# EAGLE board APDS-9008 Breakout (EAGLE 6.4)
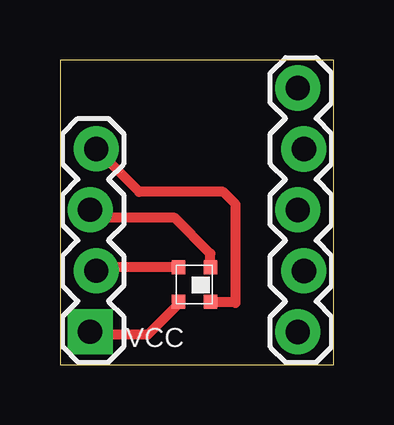
[diagram p0: board, top side]
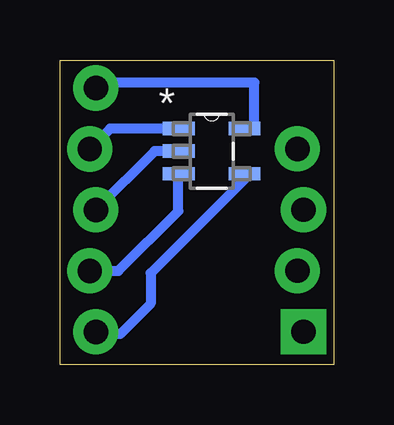
[diagram p1: board, bottom side, seen from below]

Size 11.4 x 12.69 mm. Coordinates in mm from the lower left corner, seen from the top.
Outline: 0,0 11.4,0 11.4,12.69 0,12.69 0,0
Copper layers (1*16): Top 0.035mm / dielectric 1.5mm / Bottom 0.035mm
Design rules "default": minimum track width 10mil, minimum drill 24mil, track to track 8mil, track to pad 8mil, pad to pad 8mil, via to via 8mil, smd to smd 8mil, copper to edge 40mil, drill to drill 8mil, minimum pad ring 10mil, minimum via ring 8mil, stop-mask expansion 4mil, vias tented up to drill 0mil, thermal gap 10mil

## Footprints (pad centres in the part's own frame; a part is rotated, then mirrored left to right if it is on the bottom)
1X04_LOCK = drill 1.016 pad 1.88 square: 1 0,0.127 | drill 1.016 pad 1.88: 2 2.54,-0.127; 3 5.08,0.127; 4 7.62,-0.127
1X05_LOCK = drill 1.016 pad 1.88: 1 0,0.127; 2 2.54,-0.127; 3 5.08,0.127; 4 7.62,-0.127; 5 10.16,0.127
APDS9008 = smd 0.577 x 0.577: GND 0.08,-1.52; NCC1 0.08,-0.08; OUT 1.41,-1.52; VCC 1.41,-0.08
SOT95P270X145-5N = smd 1.321 x 0.559: 1 -1.372,0.94; 2 -1.372,0; 3 -1.372,-0.94; 4 1.372,-0.94; 5 1.372,0.94

## Placement (x,y rotation side)
JP1  [1X04_LOCK]  1.38,1.37 90 top
JP2  [1X05_LOCK]  10.03,1.36 90 top
U$1  APDS9008  [APDS9008]  6.35,2.54 180 top
U$2  MCP6001UT-E/OT  [SOT95P270X145-5N]  5.08,8.89 0 bottom

## Library data of the parts
JP1 JP2 = SparkFun
U$1 = Random parts
U$2 = Random parts; MPN: MCP6001UT-E/OT; OC_FARNELL: 1840893; OC_NEWARK: 84R5183; PACKAGE: SOT23-5; SUPPLIER: Microchip

## Nets
A-GND: JP1.3 U$1.GND
A-NC: JP1.4 U$1.NCC1
A-OUT: JP1.2 U$1.OUT
A-VCC: JP1.1 U$1.VCC
M-VDD: JP2.5 U$2.5
M-VIN+: JP2.2 U$2.3
M-VIN-: JP2.1 U$2.4
M-VOUT: JP2.4 U$2.1
M-VSS: JP2.3 U$2.2

## Tracks (layer width: path | path; a pad name or v marks a point on that pad's centre or on a via)
A-GND
  Top 0.406: U$1.GND 6.27,4.63 4.78,6.11 1.59,6.11 JP1.3
A-NC
  Top 0.406: U$1.NCC1 7.27,2.62 7.32,2.57 7.32,6.68 6.79,7.2 3.3,7.2 JP1.4
A-OUT
  Top 0.406: U$1.OUT 1.66,4.06 JP1.2
A-VCC
  Top 0.406: U$1.VCC 4.94,2.53 3.66,1.25 1.38,1.25 JP1.1
M-VDD
  Bottom 0.406: U$2.5 3.3,9.83 3.3,11.74 9.91,11.74 JP2.5
M-VIN+
  Bottom 0.406: JP2.2 8.96,3.9 6.47,6.39 6.47,7.93 U$2.3
M-VIN-
  Bottom 0.406: U$2.4 3.71,7.72 7.62,3.81 7.62,2.54 8.89,1.27 9.81,1.27 JP2.1
M-VOUT
  Bottom 0.406: U$2.1 9.31,9.83 JP2.4
M-VSS
  Bottom 0.406: U$2.2 7.46,8.89 JP2.3

## Text on the board
_tsilk: VCC